# EAGLE board Qwiic_4_Pin_Fan_Controller-Panel (EAGLE 9.5.2), part 1 of 2
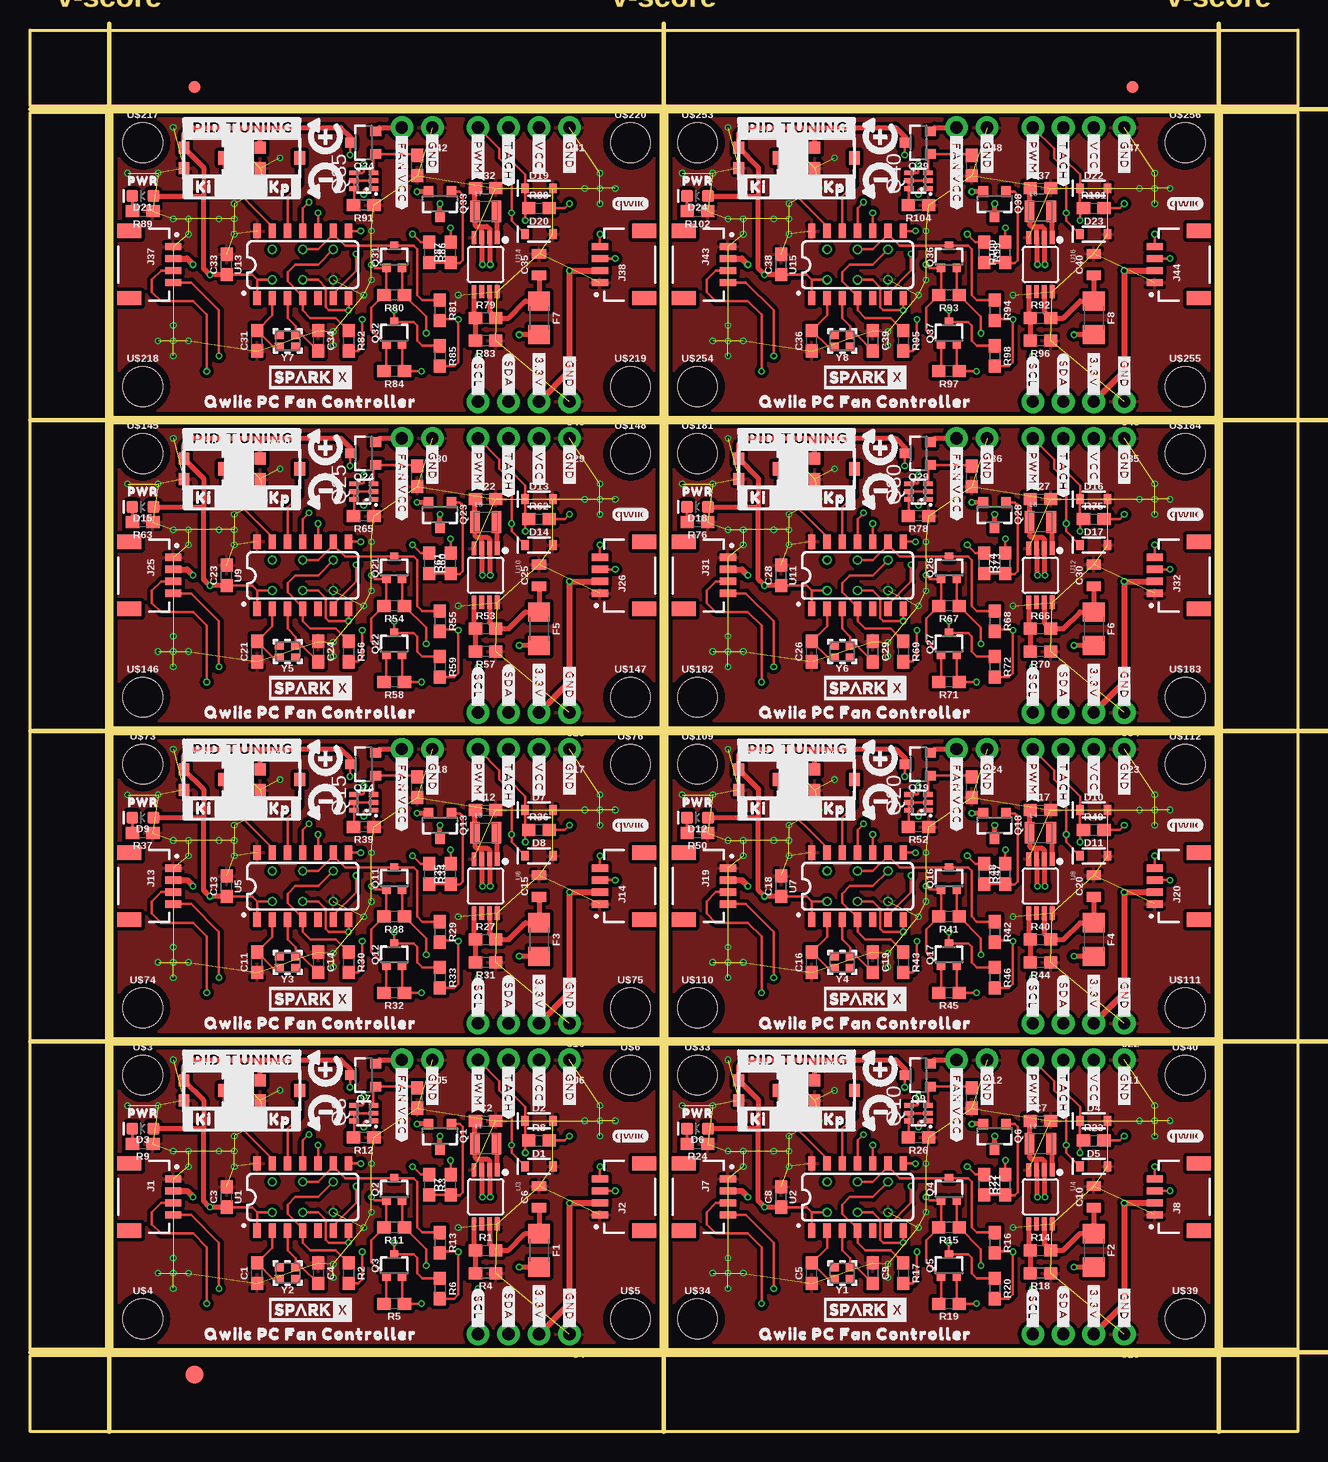
[diagram p0: board, top side]
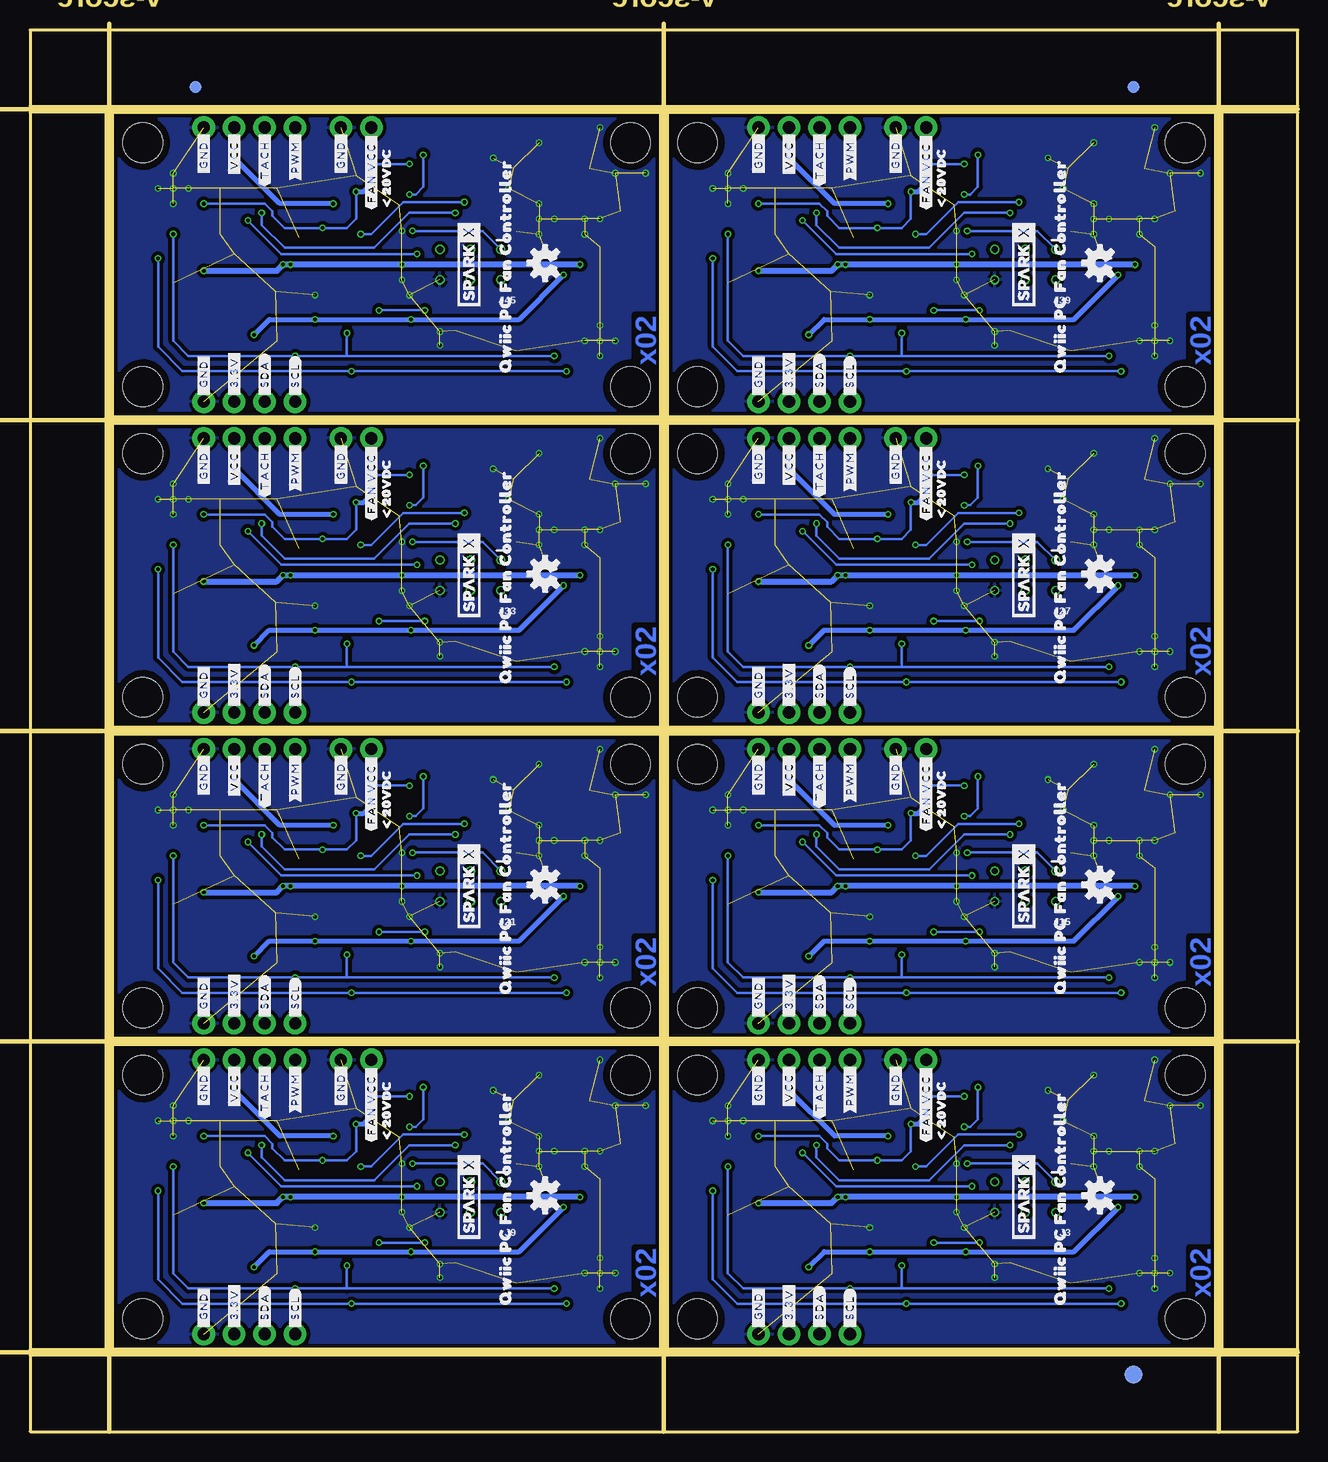
[diagram p1: board, bottom side, seen from below]

Size 105.66 x 116.84 mm. Coordinates in mm from the lower left corner, seen from the top.
Outline: 6.86,6.86 52.58,6.86 52.58,32.26 6.86,32.26 6.86,6.86
Outline: 53.09,6.86 98.81,6.86 98.81,32.26 53.09,32.26 53.09,6.86
Outline: 6.86,32.77 52.58,32.77 52.58,58.17 6.86,58.17 6.86,32.77
Outline: 53.09,32.77 98.81,32.77 98.81,58.17 53.09,58.17 53.09,32.77
Outline: 6.86,58.67 52.58,58.67 52.58,84.07 6.86,84.07 6.86,58.67
Outline: 53.09,58.67 98.81,58.67 98.81,84.07 53.09,84.07 53.09,58.67
Outline: 6.86,84.58 52.58,84.58 52.58,109.98 6.86,109.98 6.86,84.58
Outline: 53.09,84.58 98.81,84.58 98.81,109.98 53.09,109.98 53.09,84.58
Outline: 0,6.35 105.66,6.35 105.66,0 0,0 0,6.35
Outline: 99.31,109.98 105.66,109.98 105.66,6.86 99.31,6.86 99.31,109.98
Outline: 0,116.84 105.66,116.84 105.66,110.49 0,110.49 0,116.84
Outline: 0,109.98 6.35,109.98 6.35,6.86 0,6.86 0,109.98
Copper layers (1*16): Top 0.035mm / dielectric 1.5mm / Bottom 0.035mm
Design rules "Qwiic_4_Pin_Fan_Controller": minimum track width 5mil, minimum drill 0.3mm, track to track 5mil, track to pad 5mil, pad to pad 5mil, via to via 5mil, smd to smd 5mil, copper to edge 7mil, drill to drill 7mil, minimum pad ring 5mil, minimum via ring 5mil, stop-mask expansion 4mil, vias tented up to drill 25mil, thermal gap 10mil
Net classes: 1 power: width 0.203 mm
Milling: 8 lines

## Footprints (pad centres in the part's own frame; a part is rotated, then mirrored left to right if it is on the bottom)
0603 = smd 1.1 x 1: 1 -0.85,0; 2 0.85,0
0805 = smd 0.8 x 1.2: 1 -0.9,0; 2 0.9,0
SOD-323 = smd 0.63 x 0.83: A 1.15,0; C -1.15,0
LED-0603 = smd 1 x 1: A -0.877,0; C 0.877,0
FIDUCIAL-1X2 = smd 1 x 1: 1 0,0
FIDUCIAL-1.5X3 = smd 1.5 x 1.5: 1 0,0
1206 = smd 1.6 x 1.8: 1 -1.4,0; 2 1.4,0
JST04_1MM_RA = smd 0.6 x 1.35: 1 -1.5,0; 2 -0.5,0; 3 0.5,0; 4 1.5,0 | smd 1.2 x 2: NC1 2.8,-3.675; NC2 -2.8,-3.675
2X3_TEST_POINTS = drill 0.508: 1 -2.54,-1.27; 2 -2.54,1.27; 3 0,-1.27; 4 0,1.27; 5 2.54,-1.27; 6 2.54,1.27
1X04_NO_SILK = drill 1.016 pad 1.88: 1 0,0; 2 2.54,0; 3 5.08,0; 4 7.62,0
1X02_NO_SILK = drill 1.016 pad 1.88: 1 0,0; 2 2.54,0
0806 = smd 0.8 x 1.8: 1 -0.9,0; 2 0.9,0
SOT23-3 = smd 0.8 x 0.9: 1 -0.95,-1; 2 0.95,-1; 3 0,1.1
SOT323 = smd 0.7 x 0.7: 1 -0.65,-0.925; 2 0.65,-0.925; 3 0,0.925
SOT363_PHILIPS = smd 0.4 x 0.8: 1 -0.65,-0.8; 2 0,-0.8; 3 0.65,-0.8; 4 0.65,0.8; 5 0,0.8; 6 -0.65,0.8
0603@1 = smd 1.1 x 1: 1 -0.85,0; 2 0.85,0
SO14 = smd 0.6 x 1.2: 1 -3.81,-2.8; 2 -2.54,-2.8; 3 -1.27,-2.8; 4 0,-2.8; 5 1.27,-2.8; 6 2.54,-2.8; 7 3.81,-2.8; 8 3.81,2.8; 9 2.54,2.8; 10 1.27,2.8; 11 0,2.8; 12 -1.27,2.8; 13 -2.54,2.8; 14 -3.81,2.8
MSOP8 = smd 0.4 x 1.1: 1 -0.975,-2.25; 2 -0.325,-2.25; 3 0.325,-2.25; 4 0.975,-2.25; 5 0.975,2.25; 6 0.325,2.25; 7 -0.325,2.25; 8 -0.975,2.25
STAND-OFF = hole 3.302: 0,0
TRIMPOT-SMD-3MM-CLOSED = smd 1 x 0.9: 1 -0.85,-1.65; 3 0.85,-1.65 | smd 1.1 x 0.9: 2 0,1.65
CRYSTAL-SMD-2.0X1.6MM = smd 0.75 x 0.7: 1 -0.675,-0.5; 2 0.675,-0.5; 3 0.675,0.5; 4 -0.675,0.5

## Placement (x,y rotation side)
C1  22pF  [0603]  18.92,13.21 90 top
C2  10uF  [0603]  37.97,25.91 0 top
C3  0.1uF  [0603]  16.38,19.56 90 top
C4  22pF  [0603]  24,13.21 270 top
C5  22pF  [0603]  65.15,13.21 90 top
C6  22uF  [0805]  42.42,19.56 90 top
C7  10uF  [0603]  84.2,25.91 0 top
C8  0.1uF  [0603]  62.61,19.56 90 top
C9  22pF  [0603]  70.23,13.21 270 top
C10  22uF  [0805]  88.65,19.56 90 top
C11  22pF  [0603]  18.92,39.12 90 top
C12  10uF  [0603]  37.97,51.82 0 top
C13  0.1uF  [0603]  16.38,45.47 90 top
C14  22pF  [0603]  24,39.12 270 top
C15  22uF  [0805]  42.42,45.47 90 top
C16  22pF  [0603]  65.15,39.12 90 top
C17  10uF  [0603]  84.2,51.82 0 top
C18  0.1uF  [0603]  62.61,45.47 90 top
C19  22pF  [0603]  70.23,39.12 270 top
C20  22uF  [0805]  88.65,45.47 90 top
C21  22pF  [0603]  18.92,65.02 90 top
C22  10uF  [0603]  37.97,77.72 0 top
C23  0.1uF  [0603]  16.38,71.37 90 top
C24  22pF  [0603]  24,65.02 270 top
C25  22uF  [0805]  42.42,71.37 90 top
C26  22pF  [0603]  65.15,65.02 90 top
C27  10uF  [0603]  84.2,77.72 0 top
C28  0.1uF  [0603]  62.61,71.37 90 top
C29  22pF  [0603]  70.23,65.02 270 top
C30  22uF  [0805]  88.65,71.37 90 top
C31  22pF  [0603]  18.92,90.93 90 top
C32  10uF  [0603]  37.97,103.63 0 top
C33  0.1uF  [0603]  16.38,97.28 90 top
C34  22pF  [0603]  24,90.93 270 top
C35  22uF  [0805]  42.42,97.28 90 top
C36  22pF  [0603]  65.15,90.93 90 top
C37  10uF  [0603]  84.2,103.63 0 top
C38  0.1uF  [0603]  62.61,97.28 90 top
C39  22pF  [0603]  70.23,90.93 270 top
C40  22uF  [0805]  88.65,97.28 90 top
D1  3.6V  [SOD-323]  42.42,22.1 0 top
D2  3.6V  [SOD-323]  42.42,25.91 0 top
D3  RED  [LED-0603]  9.4,25.27 180 top
D4  3.6V  [SOD-323]  88.65,25.91 0 top
D5  3.6V  [SOD-323]  88.65,22.1 0 top
D6  RED  [LED-0603]  55.63,25.27 180 top
D7  3.6V  [SOD-323]  42.42,51.82 0 top
D8  3.6V  [SOD-323]  42.42,48.01 0 top
D9  RED  [LED-0603]  9.4,51.18 180 top
D10  3.6V  [SOD-323]  88.65,51.82 0 top
D11  3.6V  [SOD-323]  88.65,48.01 0 top
D12  RED  [LED-0603]  55.63,51.18 180 top
D13  3.6V  [SOD-323]  42.42,77.72 0 top
D14  3.6V  [SOD-323]  42.42,73.91 0 top
D15  RED  [LED-0603]  9.4,77.09 180 top
D16  3.6V  [SOD-323]  88.65,77.72 0 top
D17  3.6V  [SOD-323]  88.65,73.91 0 top
D18  RED  [LED-0603]  55.63,77.09 180 top
D19  3.6V  [SOD-323]  42.42,103.63 0 top
D20  3.6V  [SOD-323]  42.42,99.82 0 top
D21  RED  [LED-0603]  9.4,103 180 top
D22  3.6V  [SOD-323]  88.65,103.63 0 top
D23  3.6V  [SOD-323]  88.65,99.82 0 top
D24  RED  [LED-0603]  55.63,103 180 top
E$1  [FIDUCIAL-1X2]  13.72,112.08 0 top
E$2  [FIDUCIAL-1X2]  13.72,112.08 0 bottom
E$3  [FIDUCIAL-1X2]  91.88,112.08 0 top
E$4  [FIDUCIAL-1X2]  91.88,112.08 0 bottom
E$5  [FIDUCIAL-1.5X3]  13.72,4.76 0 top
E$6  [FIDUCIAL-1.5X3]  13.72,4.76 0 bottom
F1  6V/0.75A  [1206]  42.42,15.11 270 top
F2  6V/0.75A  [1206]  88.65,15.11 270 top
F3  6V/0.75A  [1206]  42.42,41.02 270 top
F4  6V/0.75A  [1206]  88.65,41.02 270 top
F5  6V/0.75A  [1206]  42.42,66.93 270 top
F6  6V/0.75A  [1206]  88.65,66.93 270 top
F7  6V/0.75A  [1206]  42.42,92.84 270 top
F8  6V/0.75A  [1206]  88.65,92.84 270 top
J1  QWIIC_RIGHT_ANGLE  [JST04_1MM_RA]  11.94,19.56 270 top
J2  QWIIC_RIGHT_ANGLE  [JST04_1MM_RA]  47.5,19.56 90 top
J3  AVR_SPI_PROG_3X2TESTPOINTS  [2X3_TEST_POINTS]  22.73,19.56 180 bottom
J4  [1X04_NO_SILK]  44.96,8.13 180 top
J5  [1X02_NO_SILK]  33.53,30.99 180 top
J6  [1X04_NO_SILK]  44.96,30.99 180 top
J7  QWIIC_RIGHT_ANGLE  [JST04_1MM_RA]  58.17,19.56 270 top
J8  QWIIC_RIGHT_ANGLE  [JST04_1MM_RA]  93.73,19.56 90 top
J9  AVR_SPI_PROG_3X2TESTPOINTS  [2X3_TEST_POINTS]  68.96,19.56 180 bottom
J10  [1X04_NO_SILK]  91.19,8.13 180 top
J11  [1X04_NO_SILK]  91.19,30.99 180 top
J12  [1X02_NO_SILK]  79.76,30.99 180 top
J13  QWIIC_RIGHT_ANGLE  [JST04_1MM_RA]  11.94,45.47 270 top
J14  QWIIC_RIGHT_ANGLE  [JST04_1MM_RA]  47.5,45.47 90 top
J15  AVR_SPI_PROG_3X2TESTPOINTS  [2X3_TEST_POINTS]  22.73,45.47 180 bottom
J16  [1X04_NO_SILK]  44.96,34.04 180 top
J17  [1X04_NO_SILK]  44.96,56.9 180 top
J18  [1X02_NO_SILK]  33.53,56.9 180 top
J19  QWIIC_RIGHT_ANGLE  [JST04_1MM_RA]  58.17,45.47 270 top
J20  QWIIC_RIGHT_ANGLE  [JST04_1MM_RA]  93.73,45.47 90 top
J21  AVR_SPI_PROG_3X2TESTPOINTS  [2X3_TEST_POINTS]  68.96,45.47 180 bottom
J22  [1X04_NO_SILK]  91.19,34.04 180 top
J23  [1X04_NO_SILK]  91.19,56.9 180 top
J24  [1X02_NO_SILK]  79.76,56.9 180 top
J25  QWIIC_RIGHT_ANGLE  [JST04_1MM_RA]  11.94,71.37 270 top
J26  QWIIC_RIGHT_ANGLE  [JST04_1MM_RA]  47.5,71.37 90 top
J27  AVR_SPI_PROG_3X2TESTPOINTS  [2X3_TEST_POINTS]  22.73,71.37 180 bottom
J28  [1X04_NO_SILK]  44.96,59.94 180 top
J29  [1X04_NO_SILK]  44.96,82.8 180 top
J30  [1X02_NO_SILK]  33.53,82.8 180 top
J31  QWIIC_RIGHT_ANGLE  [JST04_1MM_RA]  58.17,71.37 270 top
J32  QWIIC_RIGHT_ANGLE  [JST04_1MM_RA]  93.73,71.37 90 top
J33  AVR_SPI_PROG_3X2TESTPOINTS  [2X3_TEST_POINTS]  68.96,71.37 180 bottom
J34  [1X04_NO_SILK]  91.19,59.94 180 top
J35  [1X04_NO_SILK]  91.19,82.8 180 top
J36  [1X02_NO_SILK]  79.76,82.8 180 top
J37  QWIIC_RIGHT_ANGLE  [JST04_1MM_RA]  11.94,97.28 270 top
J38  QWIIC_RIGHT_ANGLE  [JST04_1MM_RA]  47.5,97.28 90 top
J39  AVR_SPI_PROG_3X2TESTPOINTS  [2X3_TEST_POINTS]  22.73,97.28 180 bottom
J40  [1X04_NO_SILK]  44.96,85.85 180 top
J41  [1X04_NO_SILK]  44.96,108.71 180 top
J42  [1X02_NO_SILK]  33.53,108.71 180 top
J43  QWIIC_RIGHT_ANGLE  [JST04_1MM_RA]  58.17,97.28 270 top
J44  QWIIC_RIGHT_ANGLE  [JST04_1MM_RA]  93.73,97.28 90 top
J45  AVR_SPI_PROG_3X2TESTPOINTS  [2X3_TEST_POINTS]  68.96,97.28 180 bottom
J46  [1X04_NO_SILK]  91.19,85.85 180 top
J47  [1X04_NO_SILK]  91.19,108.71 180 top
J48  [1X02_NO_SILK]  79.76,108.71 180 top
L1  2.2μH  [0806]  37.97,24 0 top
L2  2.2μH  [0806]  84.2,24 0 top
L3  2.2μH  [0806]  37.97,49.91 0 top
L4  2.2μH  [0806]  84.2,49.91 0 top
L5  2.2μH  [0806]  37.97,75.82 0 top
L6  2.2μH  [0806]  84.2,75.82 0 top
L7  2.2μH  [0806]  37.97,101.73 0 top
L8  2.2μH  [0806]  84.2,101.73 0 top
Q1  20V/4.2A/52mΩ/1.4W  [SOT23-3]  34.16,24.64 180 top
Q2  310mA/60V/1.6Ω  [SOT323]  30.35,20.19 0 top
Q3  310mA/60V/1.6Ω  [SOT323]  30.35,13.84 0 top
Q4  310mA/60V/1.6Ω  [SOT323]  76.58,20.19 0 top
Q5  310mA/60V/1.6Ω  [SOT323]  76.58,13.84 0 top
Q6  20V/4.2A/52mΩ/1.4W  [SOT23-3]  80.39,24.64 180 top
Q7  20V/4.2A/52mΩ/1.4W  [SOT23-3]  27.81,29.72 90 top
Q8  [SOT363_PHILIPS]  27.81,26.54 90 top
Q9  20V/4.2A/52mΩ/1.4W  [SOT23-3]  74.04,29.72 90 top
Q10  [SOT363_PHILIPS]  74.04,26.54 90 top
Q11  310mA/60V/1.6Ω  [SOT323]  30.35,46.1 0 top
Q12  310mA/60V/1.6Ω  [SOT323]  30.35,39.75 0 top
Q13  20V/4.2A/52mΩ/1.4W  [SOT23-3]  34.16,50.55 180 top
Q14  20V/4.2A/52mΩ/1.4W  [SOT23-3]  27.81,55.63 90 top
Q15  [SOT363_PHILIPS]  27.81,52.45 90 top
Q16  310mA/60V/1.6Ω  [SOT323]  76.58,46.1 0 top
Q17  310mA/60V/1.6Ω  [SOT323]  76.58,39.75 0 top
Q18  20V/4.2A/52mΩ/1.4W  [SOT23-3]  80.39,50.55 180 top
Q19  20V/4.2A/52mΩ/1.4W  [SOT23-3]  74.04,55.63 90 top
Q20  [SOT363_PHILIPS]  74.04,52.45 90 top
Q21  310mA/60V/1.6Ω  [SOT323]  30.35,72.01 0 top
Q22  310mA/60V/1.6Ω  [SOT323]  30.35,65.66 0 top
Q23  20V/4.2A/52mΩ/1.4W  [SOT23-3]  34.16,76.45 180 top
Q24  20V/4.2A/52mΩ/1.4W  [SOT23-3]  27.81,81.53 90 top
Q25  [SOT363_PHILIPS]  27.81,78.36 90 top
Q26  310mA/60V/1.6Ω  [SOT323]  76.58,72.01 0 top
Q27  310mA/60V/1.6Ω  [SOT323]  76.58,65.66 0 top
Q28  20V/4.2A/52mΩ/1.4W  [SOT23-3]  80.39,76.45 180 top
Q29  20V/4.2A/52mΩ/1.4W  [SOT23-3]  74.04,81.53 90 top
Q30  [SOT363_PHILIPS]  74.04,78.36 90 top
Q31  310mA/60V/1.6Ω  [SOT323]  30.35,97.92 0 top
Q32  310mA/60V/1.6Ω  [SOT323]  30.35,91.57 0 top
Q33  20V/4.2A/52mΩ/1.4W  [SOT23-3]  34.16,102.36 180 top
Q34  20V/4.2A/52mΩ/1.4W  [SOT23-3]  27.81,107.44 90 top
Q35  [SOT363_PHILIPS]  27.81,104.27 90 top
Q36  310mA/60V/1.6Ω  [SOT323]  76.58,97.92 0 top
Q37  310mA/60V/1.6Ω  [SOT323]  76.58,91.57 0 top
Q38  20V/4.2A/52mΩ/1.4W  [SOT23-3]  80.39,102.36 180 top
Q39  20V/4.2A/52mΩ/1.4W  [SOT23-3]  74.04,107.44 90 top
Q40  [SOT363_PHILIPS]  74.04,104.27 90 top
R1  750K  [0603]  37.97,15.11 0 top
R2  10k  [0603@1]  26.54,13.21 270 top
R3  1k  [0603]  33.27,20.57 270 top
R4  100k  [0603]  37.97,13.21 180 top
R5  2.2k  [0603]  30.35,10.67 180 top
R6  2.2k  [0603]  34.16,11.94 270 top
R7  10k  [0603@1]  35.05,20.57 90 top
R8  10k  [0603@1]  42.42,24.26 0 top
R9  1k  [0603]  9.4,24 180 top
R10  47k  [0603@1]  32.26,27.81 90 top
R11  2.2k  [0603]  30.35,17.02 180 top
R12  10k  [0603@1]  27.81,24.51 180 top
R13  2.2k  [0603]  34.16,15.75 270 top
R14  750K  [0603]  84.2,15.11 0 top
R15  2.2k  [0603]  76.58,17.02 180 top
R16  2.2k  [0603]  80.39,15.75 270 top
R17  10k  [0603@1]  72.77,13.21 270 top
R18  100k  [0603]  84.2,13.21 180 top
R19  2.2k  [0603]  76.58,10.67 180 top
R20  2.2k  [0603]  80.39,11.94 270 top
R21  1k  [0603]  79.5,20.57 270 top
R22  10k  [0603@1]  81.28,20.57 90 top
R23  10k  [0603@1]  88.65,24.26 0 top
R24  1k  [0603]  55.63,24 180 top
R25  47k  [0603@1]  78.49,27.81 90 top
R26  10k  [0603@1]  74.04,24.51 180 top
R27  750K  [0603]  37.97,41.02 0 top
R28  2.2k  [0603]  30.35,42.93 180 top
R29  2.2k  [0603]  34.16,41.66 270 top
R30  10k  [0603@1]  26.54,39.12 270 top
R31  100k  [0603]  37.97,39.12 180 top
R32  2.2k  [0603]  30.35,36.58 180 top
R33  2.2k  [0603]  34.16,37.85 270 top
R34  1k  [0603]  33.27,46.48 270 top
R35  10k  [0603@1]  35.05,46.48 90 top
R36  10k  [0603@1]  42.42,50.16 0 top
R37  1k  [0603]  9.4,49.91 180 top
R38  47k  [0603@1]  32.26,53.72 90 top
R39  10k  [0603@1]  27.81,50.42 180 top
R40  750K  [0603]  84.2,41.02 0 top
R41  2.2k  [0603]  76.58,42.93 180 top
R42  2.2k  [0603]  80.39,41.66 270 top
R43  10k  [0603@1]  72.77,39.12 270 top
R44  100k  [0603]  84.2,39.12 180 top
R45  2.2k  [0603]  76.58,36.58 180 top
R46  2.2k  [0603]  80.39,37.85 270 top
R47  1k  [0603]  79.5,46.48 270 top
R48  10k  [0603@1]  81.28,46.48 90 top
R49  10k  [0603@1]  88.65,50.16 0 top
R50  1k  [0603]  55.63,49.91 180 top
R51  47k  [0603@1]  78.49,53.72 90 top
R52  10k  [0603@1]  74.04,50.42 180 top
R53  750K  [0603]  37.97,66.93 0 top
R54  2.2k  [0603]  30.35,68.83 180 top
R55  2.2k  [0603]  34.16,67.56 270 top
R56  10k  [0603@1]  26.54,65.02 270 top
R57  100k  [0603]  37.97,65.02 180 top
R58  2.2k  [0603]  30.35,62.48 180 top
R59  2.2k  [0603]  34.16,63.75 270 top
R60  1k  [0603]  33.27,72.39 270 top
R61  10k  [0603@1]  35.05,72.39 90 top
R62  10k  [0603@1]  42.42,76.07 0 top
R63  1k  [0603]  9.4,75.82 180 top
R64  47k  [0603@1]  32.26,79.63 90 top
R65  10k  [0603@1]  27.81,76.33 180 top
R66  750K  [0603]  84.2,66.93 0 top
R67  2.2k  [0603]  76.58,68.83 180 top
R68  2.2k  [0603]  80.39,67.56 270 top
R69  10k  [0603@1]  72.77,65.02 270 top
R70  100k  [0603]  84.2,65.02 180 top
R71  2.2k  [0603]  76.58,62.48 180 top
R72  2.2k  [0603]  80.39,63.75 270 top
R73  1k  [0603]  79.5,72.39 270 top
R74  10k  [0603@1]  81.28,72.39 90 top
R75  10k  [0603@1]  88.65,76.07 0 top
R76  1k  [0603]  55.63,75.82 180 top
R77  47k  [0603@1]  78.49,79.63 90 top
R78  10k  [0603@1]  74.04,76.33 180 top
R79  750K  [0603]  37.97,92.84 0 top
R80  2.2k  [0603]  30.35,94.74 180 top
R81  2.2k  [0603]  34.16,93.47 270 top
R82  10k  [0603@1]  26.54,90.93 270 top
R83  100k  [0603]  37.97,90.93 180 top
R84  2.2k  [0603]  30.35,88.39 180 top
R85  2.2k  [0603]  34.16,89.66 270 top
R86  1k  [0603]  33.27,98.3 270 top
R87  10k  [0603@1]  35.05,98.3 90 top
R88  10k  [0603@1]  42.42,101.98 0 top
R89  1k  [0603]  9.4,101.73 180 top
R90  47k  [0603@1]  32.26,105.54 90 top
R91  10k  [0603@1]  27.81,102.23 180 top
R92  750K  [0603]  84.2,92.84 0 top
R93  2.2k  [0603]  76.58,94.74 180 top
R94  2.2k  [0603]  80.39,93.47 270 top
R95  10k  [0603@1]  72.77,90.93 270 top
R96  100k  [0603]  84.2,90.93 180 top
R97  2.2k  [0603]  76.58,88.39 180 top
R98  2.2k  [0603]  80.39,89.66 270 top
R99  1k  [0603]  79.5,98.3 270 top
R100  10k  [0603@1]  81.28,98.3 90 top
R101  10k  [0603@1]  88.65,101.98 0 top
R102  1k  [0603]  55.63,101.73 180 top
R103  47k  [0603@1]  78.49,105.54 90 top
R104  10k  [0603@1]  74.04,102.23 180 top
U1  ATtiny841  [SO14]  22.73,19.56 0 top
U2  ATtiny841  [SO14]  68.96,19.56 0 top
U3  PAM2401  [MSOP8]  37.97,19.56 180 top
U4  PAM2401  [MSOP8]  84.2,19.56 180 top
U5  ATtiny841  [SO14]  22.73,45.47 0 top
U6  PAM2401  [MSOP8]  37.97,45.47 180 top
U7  ATtiny841  [SO14]  68.96,45.47 0 top
U8  PAM2401  [MSOP8]  84.2,45.47 180 top
U9  ATtiny841  [SO14]  22.73,71.37 0 top
U10  PAM2401  [MSOP8]  37.97,71.37 180 top
U11  ATtiny841  [SO14]  68.96,71.37 0 top
U12  PAM2401  [MSOP8]  84.2,71.37 180 top
U13  ATtiny841  [SO14]  22.73,97.28 0 top
U14  PAM2401  [MSOP8]  37.97,97.28 180 top
U15  ATtiny841  [SO14]  68.96,97.28 0 top
U16  PAM2401  [MSOP8]  84.2,97.28 180 top
U$1  [#_GND#0]  44.96,30.61 270 top
U$2  [#_VCC#0]  42.42,30.61 270 top
U$3  [STAND-OFF]  9.4,29.72 0 top
U$4  [STAND-OFF]  9.4,9.4 0 top
U$5  [STAND-OFF]  50.04,9.4 0 top
U$6  [STAND-OFF]  50.04,29.72 0 top
U$7  [#_TACH#0]  39.88,30.61 270 top
U$8  [#_PWM#0]  37.34,30.61 270 top
U$9  [#_GND#0]  33.53,30.61 270 top
U$10  [#GND_#0]  44.96,8.51 270 top
U$11  [#3#3V_#0]  42.42,8.51 270 top
U$12  [#SDA_#0]  39.88,8.51 270 top
U$13  [#SCL_#0]  37.34,8.51 270 top
U$14  [#PID_TUNING0]  17.78,30.99 0 top
U$15  [KI0]  14.48,26.04 0 top
U$16  [KP0]  20.83,26.04 0 top
U$17  [QWIIC_3MM]  50.04,24.64 0 top
U$18  [SPARKX-SMALL]  23.37,10.16 0 top
U$19  [#_FAN_VCC#0]  30.99,30.48 270 top
U$20  [#GND_#0]  44.96,30.61 90 bottom
U$21  [#_GND#0]  44.96,8.51 90 bottom
U$22  [PWR0]  9.4,26.54 0 top
U$23  [#VCC_#0]  42.42,30.61 90 bottom
U$24  [#TACH_#0]  39.88,30.61 90 bottom
U$25  [#PWM_#0]  37.34,30.61 90 bottom
U$26  [#GND_#0]  33.53,30.61 90 bottom
U$27  [#_3#3V#0]  42.42,8.51 90 bottom
U$28  [#_SDA#0]  39.88,8.51 90 bottom
U$29  [#_SCL#0]  37.34,8.51 90 bottom
U$30  [QWIIC_PC_FAN_CONTROLLER0]  23.37,8.13 0 top
U$31  [#FAN_VCC_#0]  30.99,30.48 90 bottom
U$32  [_#_20VDC0]  29.72,29.72 90 bottom
U$33  [STAND-OFF]  55.63,29.72 0 top
U$34  [STAND-OFF]  55.63,9.4 0 top
U$35  [QWIIC_PC_FAN_CONTROLLER0]  19.81,19.43 90 bottom
U$36  [SPARKX-SMALL]  22.86,19.56 90 bottom
U$37  [OSHW-LOGO-S]  16.51,19.68 90 bottom
U$38  [TURN_INDICATOR#SVG0]  22.99,31.88 0 top
U$39  [STAND-OFF]  96.27,9.4 0 top
U$40  [STAND-OFF]  96.27,29.72 0 top
U$41  [#_GND#0]  91.19,30.61 270 top
U$42  [#_VCC#0]  88.65,30.61 270 top
U$43  [#_TACH#0]  86.11,30.61 270 top
U$44  [#_PWM#0]  83.57,30.61 270 top
U$45  [#_GND#0]  79.76,30.61 270 top
U$46  [#GND_#0]  91.19,8.51 270 top
U$47  [#3#3V_#0]  88.65,8.51 270 top
U$48  [#SDA_#0]  86.11,8.51 270 top
U$49  [#SCL_#0]  83.57,8.51 270 top
U$50  [QWIIC_3MM]  96.27,24.64 0 top
U$51  [SPARKX-SMALL]  69.6,10.16 0 top
U$52  [#GND_#0]  91.19,30.61 90 bottom
U$53  [#_GND#0]  91.19,8.51 90 bottom
U$54  [#VCC_#0]  88.65,30.61 90 bottom
U$55  [#TACH_#0]  86.11,30.61 90 bottom
U$56  [#PWM_#0]  83.57,30.61 90 bottom
U$57  [#GND_#0]  79.76,30.61 90 bottom
U$58  [#_3#3V#0]  88.65,8.51 90 bottom
U$59  [#_SDA#0]  86.11,8.51 90 bottom
U$60  [#_SCL#0]  83.57,8.51 90 bottom
U$61  [QWIIC_PC_FAN_CONTROLLER0]  69.6,8.13 0 top
U$62  [SPARKX-SMALL]  69.09,19.56 90 bottom
U$63  [QWIIC_PC_FAN_CONTROLLER0]  66.04,19.43 90 bottom
U$64  [OSHW-LOGO-S]  62.74,19.68 90 bottom
U$65  [#_FAN_VCC#0]  77.22,30.48 270 top
U$66  [#PID_TUNING0]  64.01,30.99 0 top
U$67  [KI0]  60.71,26.04 0 top
U$68  [KP0]  67.06,26.04 0 top
U$69  [PWR0]  55.63,26.54 0 top
U$70  [TURN_INDICATOR#SVG0]  69.22,31.88 0 top
U$71  [#FAN_VCC_#0]  77.22,30.48 90 bottom
U$72  [_#_20VDC0]  75.95,29.72 90 bottom
U$73  [STAND-OFF]  9.4,55.63 0 top
U$74  [STAND-OFF]  9.4,35.31 0 top
U$75  [STAND-OFF]  50.04,35.31 0 top
U$76  [STAND-OFF]  50.04,55.63 0 top
U$77  [#_GND#0]  44.96,56.51 270 top
U$78  [#_VCC#0]  42.42,56.51 270 top
U$79  [#_TACH#0]  39.88,56.51 270 top
U$80  [#_PWM#0]  37.34,56.51 270 top
U$81  [#_GND#0]  33.53,56.51 270 top
U$82  [#GND_#0]  44.96,34.42 270 top
U$83  [#3#3V_#0]  42.42,34.42 270 top
U$84  [#SDA_#0]  39.88,34.42 270 top
U$85  [#SCL_#0]  37.34,34.42 270 top
U$86  [QWIIC_3MM]  50.04,50.55 0 top
U$87  [SPARKX-SMALL]  23.37,36.07 0 top
U$88  [#GND_#0]  44.96,56.51 90 bottom
U$89  [#_GND#0]  44.96,34.42 90 bottom
U$90  [#VCC_#0]  42.42,56.51 90 bottom
U$91  [#TACH_#0]  39.88,56.51 90 bottom
U$92  [#PWM_#0]  37.34,56.51 90 bottom
U$93  [#GND_#0]  33.53,56.51 90 bottom
U$94  [#_3#3V#0]  42.42,34.42 90 bottom
U$95  [#_SDA#0]  39.88,34.42 90 bottom
U$96  [#_SCL#0]  37.34,34.42 90 bottom
U$97  [QWIIC_PC_FAN_CONTROLLER0]  23.37,34.04 0 top
U$98  [SPARKX-SMALL]  22.86,45.47 90 bottom
U$99  [QWIIC_PC_FAN_CONTROLLER0]  19.81,45.34 90 bottom
U$100  [OSHW-LOGO-S]  16.51,45.59 90 bottom
U$101  [#_FAN_VCC#0]  30.99,56.39 270 top
U$102  [#PID_TUNING0]  17.78,56.9 0 top
U$103  [KI0]  14.48,51.94 0 top
U$104  [KP0]  20.83,51.94 0 top
U$105  [PWR0]  9.4,52.45 0 top
U$106  [TURN_INDICATOR#SVG0]  22.99,57.78 0 top
U$107  [#FAN_VCC_#0]  30.99,56.39 90 bottom
U$108  [_#_20VDC0]  29.72,55.63 90 bottom
U$109  [STAND-OFF]  55.63,55.63 0 top
U$110  [STAND-OFF]  55.63,35.31 0 top
U$111  [STAND-OFF]  96.27,35.31 0 top
U$112  [STAND-OFF]  96.27,55.63 0 top
U$113  [#_GND#0]  91.19,56.51 270 top
U$114  [#_VCC#0]  88.65,56.51 270 top
U$115  [#_TACH#0]  86.11,56.51 270 top
U$116  [#_PWM#0]  83.57,56.51 270 top
U$117  [#_GND#0]  79.76,56.51 270 top
U$118  [#GND_#0]  91.19,34.42 270 top
U$119  [#3#3V_#0]  88.65,34.42 270 top
U$120  [#SDA_#0]  86.11,34.42 270 top
U$121  [#SCL_#0]  83.57,34.42 270 top
U$122  [QWIIC_3MM]  96.27,50.55 0 top
U$123  [SPARKX-SMALL]  69.6,36.07 0 top
U$124  [#GND_#0]  91.19,56.51 90 bottom
U$125  [#_GND#0]  91.19,34.42 90 bottom
U$126  [#VCC_#0]  88.65,56.51 90 bottom
U$127  [#TACH_#0]  86.11,56.51 90 bottom
U$128  [#PWM_#0]  83.57,56.51 90 bottom
U$129  [#GND_#0]  79.76,56.51 90 bottom
U$130  [#_3#3V#0]  88.65,34.42 90 bottom
U$131  [#_SDA#0]  86.11,34.42 90 bottom
U$132  [#_SCL#0]  83.57,34.42 90 bottom
U$133  [QWIIC_PC_FAN_CONTROLLER0]  69.6,34.04 0 top
U$134  [SPARKX-SMALL]  69.09,45.47 90 bottom
U$135  [QWIIC_PC_FAN_CONTROLLER0]  66.04,45.34 90 bottom
U$136  [OSHW-LOGO-S]  62.74,45.59 90 bottom
U$137  [#_FAN_VCC#0]  77.22,56.39 270 top
U$138  [#PID_TUNING0]  64.01,56.9 0 top
U$139  [KI0]  60.71,51.94 0 top
U$140  [KP0]  67.06,51.94 0 top
U$141  [PWR0]  55.63,52.45 0 top
U$142  [TURN_INDICATOR#SVG0]  69.22,57.78 0 top
U$143  [#FAN_VCC_#0]  77.22,56.39 90 bottom
U$144  [_#_20VDC0]  75.95,55.63 90 bottom
U$145  [STAND-OFF]  9.4,81.53 0 top
U$146  [STAND-OFF]  9.4,61.21 0 top
U$147  [STAND-OFF]  50.04,61.21 0 top
U$148  [STAND-OFF]  50.04,81.53 0 top
U$149  [#_GND#0]  44.96,82.42 270 top
U$150  [#_VCC#0]  42.42,82.42 270 top
U$151  [#_TACH#0]  39.88,82.42 270 top
U$152  [#_PWM#0]  37.34,82.42 270 top
U$153  [#_GND#0]  33.53,82.42 270 top
U$154  [#GND_#0]  44.96,60.32 270 top
U$155  [#3#3V_#0]  42.42,60.32 270 top
U$156  [#SDA_#0]  39.88,60.32 270 top
U$157  [#SCL_#0]  37.34,60.32 270 top
U$158  [QWIIC_3MM]  50.04,76.45 0 top
U$159  [SPARKX-SMALL]  23.37,61.98 0 top
U$160  [#GND_#0]  44.96,82.42 90 bottom
U$161  [#_GND#0]  44.96,60.32 90 bottom
U$162  [#VCC_#0]  42.42,82.42 90 bottom
U$163  [#TACH_#0]  39.88,82.42 90 bottom
U$164  [#PWM_#0]  37.34,82.42 90 bottom
U$165  [#GND_#0]  33.53,82.42 90 bottom
U$166  [#_3#3V#0]  42.42,60.32 90 bottom
U$167  [#_SDA#0]  39.88,60.32 90 bottom
U$168  [#_SCL#0]  37.34,60.32 90 bottom
U$169  [QWIIC_PC_FAN_CONTROLLER0]  23.37,59.94 0 top
U$170  [SPARKX-SMALL]  22.86,71.37 90 bottom
U$171  [QWIIC_PC_FAN_CONTROLLER0]  19.81,71.25 90 bottom
U$172  [OSHW-LOGO-S]  16.51,71.5 90 bottom
U$173  [#_FAN_VCC#0]  30.99,82.3 270 top
U$174  [#PID_TUNING0]  17.78,82.8 0 top
U$175  [KI0]  14.48,77.85 0 top
U$176  [KP0]  20.83,77.85 0 top
U$177  [PWR0]  9.4,78.36 0 top
U$178  [TURN_INDICATOR#SVG0]  22.99,83.69 0 top
U$179  [#FAN_VCC_#0]  30.99,82.3 90 bottom
U$180  [_#_20VDC0]  29.72,81.53 90 bottom
U$181  [STAND-OFF]  55.63,81.53 0 top
U$182  [STAND-OFF]  55.63,61.21 0 top
U$183  [STAND-OFF]  96.27,61.21 0 top
U$184  [STAND-OFF]  96.27,81.53 0 top
U$185  [#_GND#0]  91.19,82.42 270 top
U$186  [#_VCC#0]  88.65,82.42 270 top
U$187  [#_TACH#0]  86.11,82.42 270 top
U$188  [#_PWM#0]  83.57,82.42 270 top
U$189  [#_GND#0]  79.76,82.42 270 top
U$190  [#GND_#0]  91.19,60.32 270 top
U$191  [#3#3V_#0]  88.65,60.32 270 top
U$192  [#SDA_#0]  86.11,60.32 270 top
U$193  [#SCL_#0]  83.57,60.32 270 top
U$194  [QWIIC_3MM]  96.27,76.45 0 top
U$195  [SPARKX-SMALL]  69.6,61.98 0 top
U$196  [#GND_#0]  91.19,82.42 90 bottom
U$197  [#_GND#0]  91.19,60.32 90 bottom
U$198  [#VCC_#0]  88.65,82.42 90 bottom
U$199  [#TACH_#0]  86.11,82.42 90 bottom
U$200  [#PWM_#0]  83.57,82.42 90 bottom
U$201  [#GND_#0]  79.76,82.42 90 bottom
U$202  [#_3#3V#0]  88.65,60.32 90 bottom
U$203  [#_SDA#0]  86.11,60.32 90 bottom
U$204  [#_SCL#0]  83.57,60.32 90 bottom
U$205  [QWIIC_PC_FAN_CONTROLLER0]  69.6,59.94 0 top
U$206  [SPARKX-SMALL]  69.09,71.37 90 bottom
U$207  [QWIIC_PC_FAN_CONTROLLER0]  66.04,71.25 90 bottom
U$208  [OSHW-LOGO-S]  62.74,71.5 90 bottom
U$209  [#_FAN_VCC#0]  77.22,82.3 270 top
U$210  [#PID_TUNING0]  64.01,82.8 0 top
U$211  [KI0]  60.71,77.85 0 top
U$212  [KP0]  67.06,77.85 0 top
U$213  [PWR0]  55.63,78.36 0 top
U$214  [TURN_INDICATOR#SVG0]  69.22,83.69 0 top
U$215  [#FAN_VCC_#0]  77.22,82.3 90 bottom
U$216  [_#_20VDC0]  75.95,81.53 90 bottom
U$217  [STAND-OFF]  9.4,107.44 0 top
U$218  [STAND-OFF]  9.4,87.12 0 top
U$219  [STAND-OFF]  50.04,87.12 0 top
U$220  [STAND-OFF]  50.04,107.44 0 top
U$221  [#_GND#0]  44.96,108.33 270 top
U$222  [#_VCC#0]  42.42,108.33 270 top
U$223  [#_TACH#0]  39.88,108.33 270 top
U$224  [#_PWM#0]  37.34,108.33 270 top
U$225  [#_GND#0]  33.53,108.33 270 top
U$226  [#GND_#0]  44.96,86.23 270 top
U$227  [#3#3V_#0]  42.42,86.23 270 top
U$228  [#SDA_#0]  39.88,86.23 270 top
U$229  [#SCL_#0]  37.34,86.23 270 top
U$230  [QWIIC_3MM]  50.04,102.36 0 top
U$231  [SPARKX-SMALL]  23.37,87.88 0 top
U$232  [#GND_#0]  44.96,108.33 90 bottom
U$233  [#_GND#0]  44.96,86.23 90 bottom
U$234  [#VCC_#0]  42.42,108.33 90 bottom
U$235  [#TACH_#0]  39.88,108.33 90 bottom
U$236  [#PWM_#0]  37.34,108.33 90 bottom
U$237  [#GND_#0]  33.53,108.33 90 bottom
U$238  [#_3#3V#0]  42.42,86.23 90 bottom
U$239  [#_SDA#0]  39.88,86.23 90 bottom
U$240  [#_SCL#0]  37.34,86.23 90 bottom
U$241  [QWIIC_PC_FAN_CONTROLLER0]  23.37,85.85 0 top
U$242  [SPARKX-SMALL]  22.86,97.28 90 bottom
U$243  [QWIIC_PC_FAN_CONTROLLER0]  19.81,97.16 90 bottom
U$244  [OSHW-LOGO-S]  16.51,97.41 90 bottom
U$245  [#_FAN_VCC#0]  30.99,108.2 270 top
U$246  [#PID_TUNING0]  17.78,108.71 0 top
U$247  [KI0]  14.48,103.76 0 top
U$248  [KP0]  20.83,103.76 0 top
U$249  [PWR0]  9.4,104.27 0 top
U$250  [TURN_INDICATOR#SVG0]  22.99,109.6 0 top
U$251  [#FAN_VCC_#0]  30.99,108.2 90 bottom
U$252  [_#_20VDC0]  29.72,107.44 90 bottom
U$253  [STAND-OFF]  55.63,107.44 0 top
U$254  [STAND-OFF]  55.63,87.12 0 top
U$255  [STAND-OFF]  96.27,87.12 0 top
U$256  [STAND-OFF]  96.27,107.44 0 top
U$257  [#_GND#0]  91.19,108.33 270 top
U$258  [#_VCC#0]  88.65,108.33 270 top
U$259  [#_TACH#0]  86.11,108.33 270 top
U$260  [#_PWM#0]  83.57,108.33 270 top
U$261  [#_GND#0]  79.76,108.33 270 top
U$262  [#GND_#0]  91.19,86.23 270 top
U$263  [#3#3V_#0]  88.65,86.23 270 top
U$264  [#SDA_#0]  86.11,86.23 270 top
U$265  [#SCL_#0]  83.57,86.23 270 top
U$266  [QWIIC_3MM]  96.27,102.36 0 top
U$267  [SPARKX-SMALL]  69.6,87.88 0 top
U$268  [#GND_#0]  91.19,108.33 90 bottom
U$269  [#_GND#0]  91.19,86.23 90 bottom
U$270  [#VCC_#0]  88.65,108.33 90 bottom
U$271  [#TACH_#0]  86.11,108.33 90 bottom
U$272  [#PWM_#0]  83.57,108.33 90 bottom
U$273  [#GND_#0]  79.76,108.33 90 bottom
U$274  [#_3#3V#0]  88.65,86.23 90 bottom
U$275  [#_SDA#0]  86.11,86.23 90 bottom
U$276  [#_SCL#0]  83.57,86.23 90 bottom
U$277  [QWIIC_PC_FAN_CONTROLLER0]  69.6,85.85 0 top
U$278  [SPARKX-SMALL]  69.09,97.28 90 bottom
U$279  [QWIIC_PC_FAN_CONTROLLER0]  66.04,97.16 90 bottom
U$280  [OSHW-LOGO-S]  62.74,97.41 90 bottom
U$281  [#_FAN_VCC#0]  77.22,108.2 270 top
U$282  [#PID_TUNING0]  64.01,108.71 0 top
U$283  [KI0]  60.71,103.76 0 top
U$284  [KP0]  67.06,103.76 0 top
U$285  [PWR0]  55.63,104.27 0 top
U$286  [TURN_INDICATOR#SVG0]  69.22,109.6 0 top
U$287  [#FAN_VCC_#0]  77.22,108.2 90 bottom
U$288  [_#_20VDC0]  75.95,107.44 90 bottom
VR1  10k  [TRIMPOT-SMD-3MM-CLOSED]  20.83,28.45 270 top
VR2  10k  [TRIMPOT-SMD-3MM-CLOSED]  14.48,28.45 270 top
VR3  10k  [TRIMPOT-SMD-3MM-CLOSED]  67.06,28.45 270 top
VR4  10k  [TRIMPOT-SMD-3MM-CLOSED]  60.71,28.45 270 top
VR5  10k  [TRIMPOT-SMD-3MM-CLOSED]  20.83,54.36 270 top
VR6  10k  [TRIMPOT-SMD-3MM-CLOSED]  14.48,54.36 270 top
VR7  10k  [TRIMPOT-SMD-3MM-CLOSED]  67.06,54.36 270 top
VR8  10k  [TRIMPOT-SMD-3MM-CLOSED]  60.71,54.36 270 top
VR9  10k  [TRIMPOT-SMD-3MM-CLOSED]  20.83,80.26 270 top
VR10  10k  [TRIMPOT-SMD-3MM-CLOSED]  14.48,80.26 270 top
VR11  10k  [TRIMPOT-SMD-3MM-CLOSED]  67.06,80.26 270 top
VR12  10k  [TRIMPOT-SMD-3MM-CLOSED]  60.71,80.26 270 top
VR13  10k  [TRIMPOT-SMD-3MM-CLOSED]  20.83,106.17 270 top
VR14  10k  [TRIMPOT-SMD-3MM-CLOSED]  14.48,106.17 270 top
VR15  10k  [TRIMPOT-SMD-3MM-CLOSED]  67.06,106.17 270 top
VR16  10k  [TRIMPOT-SMD-3MM-CLOSED]  60.71,106.17 270 top
Y1  16MHz  [CRYSTAL-SMD-2.0X1.6MM]  67.69,13.21 180 top
Y2  16MHz  [CRYSTAL-SMD-2.0X1.6MM]  21.46,13.21 180 top
Y3  16MHz  [CRYSTAL-SMD-2.0X1.6MM]  21.46,39.12 180 top
Y4  16MHz  [CRYSTAL-SMD-2.0X1.6MM]  67.69,39.12 180 top
Y5  16MHz  [CRYSTAL-SMD-2.0X1.6MM]  21.46,65.02 180 top
Y6  16MHz  [CRYSTAL-SMD-2.0X1.6MM]  67.69,65.02 180 top
Y7  16MHz  [CRYSTAL-SMD-2.0X1.6MM]  21.46,90.93 180 top
Y8  16MHz  [CRYSTAL-SMD-2.0X1.6MM]  67.69,90.93 180 top

## Library data of the parts
C1 C4 C5 C9 C11 C14 C16 C19 C21 C24 C26 C29 C31 C34 C36 C39 = SparkFun-Capacitors; PROD_ID: CAP-07876
C2 C7 C12 C17 C22 C27 C32 C37 = SparkFun-Capacitors; PROD_ID: CAP-11015
C3 C8 C13 C18 C23 C28 C33 C38 = SparkFun-Capacitors; PROD_ID: CAP-00810
C6 C10 C15 C20 C25 C30 C35 C40 = SparkFun-Capacitors; PROD_ID: CAP-08402
D1 D2 D4 D5 D7 D8 D10 D11 D13 D14 D16 D17 D19 D20 D22 D23 = SparkFun-DiscreteSemi; PROD_ID: DIO-08199
D3 D6 D9 D12 D15 D18 D21 D24 = SparkFun-LED; PROD_ID: DIO-00819
E$1-E$4 U$17 U$37 U$50 U$64 U$86 U$100 U$122 U$136 U$158 U$172 U$194 U$208 U$230 U$244 U$266 U$280 = SparkFun-Aesthetics
E$5 E$6 = SparkFun-Retired
F1-F8 = SparkFun-Fuses; PROD_ID: RES-11150
J1 J2 J7 J8 J13 J14 J19 J20 J25 J26 J31 J32 J37 J38 J43 J44 = SparkFun-Connectors; PROD_ID: CONN-13694
J3-J5 J9 J10 J12 J15 J16 J18 J21 J22 J24 J27 J28 J30 J33 J34 J36 J39 J40 J42 J45 J46 J48 = SparkFun-Connectors
J6 J11 J17 J23 J29 J35 J41 J47 = SparkFun-Connectors; PROD_ID: CONN-09696
L1-L8 = SparkFun-Coils; PROD_ID: NDUC-14257
Q1 Q6 Q7 Q9 Q13 Q14 Q18 Q19 Q23 Q24 Q28 Q29 Q33 Q34 Q38 Q39 = SparkFun-DiscreteSemi; PROD_ID: TRAN-14388
Q2-Q5 Q11 Q12 Q16 Q17 Q21 Q22 Q26 Q27 Q31 Q32 Q36 Q37 = SparkFun-DiscreteSemi; PROD_ID: TRANS-11151
Q8 Q10 Q15 Q20 Q25 Q30 Q35 Q40 = SparkFun-DiscreteSemi; PROD_ID: TRAN-14386
R1 R14 R27 R40 R53 R66 R79 R92 = SparkFun-Resistors; PROD_ID: RES-13768
R2 R7 R8 R12 R17 R22 R23 R26 R30 R35 R36 R39 R43 R48 R49 R52 R56 R61 R62 R65 R69 R74 R75 R78 R82 R87 R88 R91 R95 R100 R101 R104 = SparkFun-Resistors; PROD_ID: RES-00824
R3 R9 R21 R24 R34 R37 R47 R50 R60 R63 R73 R76 R86 R89 R99 R102 = SparkFun-Resistors; PROD_ID: RES-07856
R4 R18 R31 R44 R57 R70 R83 R96 = SparkFun-Resistors; PROD_ID: RES-07828
R5 R6 R11 R13 R15 R16 R19 R20 R28 R29 R32 R33 R41 R42 R45 R46 R54 R55 R58 R59 R67 R68 R71 R72 R80 R81 R84 R85 R93 R94 R97 R98 = SparkFun-Resistors; PROD_ID: RES-08272
R10 R25 R38 R51 R64 R77 R90 R103 = SparkFun-Resistors; PROD_ID: RES-07871
U1 U2 U5 U7 U9 U11 U13 U15 = SparkFun-IC-Microcontroller; PROD_ID: IC-14692
U3 U4 U6 U8 U10 U12 U14 U16 = SparkFun-IC-Power; PROD_ID: IC-13769
U$1 U$2 U$7-U$16 U$19-U$32 U$35 U$41-U$49 U$52-U$61 U$63 U$65-U$69 U$71 U$72 U$77-U$85 U$88-U$97 U$99 U$101-U$105 U$107 U$108 U$113-U$121 U$124-U$133 U$135 U$137-U$141 U$143 U$144 U$149-U$157 U$160-U$169 U$171 U$173-U$177 U$179 U$180 U$185-U$193 U$196-U$205 U$207 U$209-U$213 U$215 U$216 U$221-U$229 U$232-U$241 U$243 U$245-U$249 U$251 U$252 U$257-U$265 U$268-U$277 U$279 U$281-U$285 U$287 U$288 = output
U$3-U$6 U$33 U$34 U$39 U$40 U$73-U$76 U$109-U$112 U$145-U$148 U$181-U$184 U$217-U$220 U$253-U$256 = SparkFun-Hardware
U$18 U$36 U$51 U$62 U$87 U$98 U$123 U$134 U$159 U$170 U$195 U$206 U$231 U$242 U$267 U$278 = SparkX
U$38 U$70 U$106 U$142 U$178 U$214 U$250 U$286 = turn_indicators
VR1-VR16 = SparkFun-Resistors; PROD_ID: RES-09285
Y1-Y8 = SparkFun-Clocks; PROD_ID: XTAL-14681

## Nets
3.3V: C2.1 J1.2 J2.2 J4.2 L1.1 Q2.1 Q3.1 R5.2 R11.2 U3.2 U3.3
3.3V1: C7.1 J7.2 J8.2 J10.2 L2.1 Q4.1 Q5.1 R15.2 R19.2 U4.2 U4.3
3.3V2: C12.1 J13.2 J14.2 J16.2 L3.1 Q11.1 Q12.1 R28.2 R32.2 U6.2 U6.3
3.3V3: C17.1 J19.2 J20.2 J22.2 L4.1 Q16.1 Q17.1 R41.2 R45.2 U8.2 U8.3
3.3V4: C22.1 J25.2 J26.2 J28.2 L5.1 Q21.1 Q22.1 R54.2 R58.2 U10.2 U10.3
3.3V5: C27.1 J31.2 J32.2 J34.2 L6.1 Q26.1 Q27.1 R67.2 R71.2 U12.2 U12.3
3.3V6: C32.1 J37.2 J38.2 J40.2 L7.1 Q31.1 Q32.1 R80.2 R84.2 U14.2 U14.3
3.3V7: C37.1 J43.2 J44.2 J46.2 L8.1 Q36.1 Q37.1 R93.2 R97.2 U16.2 U16.3
5V: C3.1 D3.A F1.2 J3.2 Q7.3 Q8.1 R2.2 R6.2 R13.2 U1.1 VR1.1 VR2.1
5V1: C8.1 D6.A F2.2 J9.2 Q9.3 Q10.1 R16.2 R17.2 R20.2 U2.1 VR3.1 VR4.1
5V2: C13.1 D9.A F3.2 J15.2 Q14.3 Q15.1 R29.2 R30.2 R33.2 U5.1 VR5.1 VR6.1
5V3: C18.1 D12.A F4.2 J21.2 Q19.3 Q20.1 R42.2 R43.2 R46.2 U7.1 VR7.1 VR8.1
5V4: C23.1 D15.A F5.2 J27.2 Q24.3 Q25.1 R55.2 R56.2 R59.2 U9.1 VR9.1 VR10.1
5V5: C28.1 D18.A F6.2 J33.2 Q29.3 Q30.1 R68.2 R69.2 R72.2 U11.1 VR11.1 VR12.1
5V6: C33.1 D21.A F7.2 J39.2 Q34.3 Q35.1 R81.2 R82.2 R85.2 U13.1 VR13.1 VR14.1
5V7: C38.1 D24.A F8.2 J45.2 Q39.3 Q40.1 R94.2 R95.2 R98.2 U15.1 VR15.1 VR16.1
!FAN_EN: R3.1 U1.11
!FAN_EN1: R21.1 U2.11
!FAN_EN2: R34.1 U5.11
!FAN_EN3: R47.1 U7.11
!FAN_EN4: R60.1 U9.11
!FAN_EN5: R73.1 U11.11
!FAN_EN6: R86.1 U13.11
!FAN_EN7: R99.1 U15.11
!RST: J3.5 R2.1 U1.4
!RST1: J9.5 R17.1 U2.4
!RST2: J15.5 R30.1 U5.4
!RST3: J21.5 R43.1 U7.4
!RST4: J27.5 R56.1 U9.4
!RST5: J33.5 R69.1 U11.4
!RST6: J39.5 R82.1 U13.4
!RST7: J45.5 R95.1 U15.4
CIPO: J3.1 U1.8
CIPO1: J9.1 U2.8
CIPO2: J15.1 U5.8
CIPO3: J21.1 U7.8
CIPO4: J27.1 U9.8
CIPO5: J33.1 U11.8
CIPO6: J39.1 U13.8
CIPO7: J45.1 U15.8
FAN_PWM: D1.C J6.4 U1.10
FAN_PWM1: D5.C J11.4 U2.10
FAN_PWM2: D8.C J17.4 U5.10
FAN_PWM3: D11.C J23.4 U7.10
FAN_PWM4: D14.C J29.4 U9.10
FAN_PWM5: D17.C J35.4 U11.10
FAN_PWM6: D20.C J41.4 U13.10
FAN_PWM7: D23.C J47.4 U15.10
FAN_PWR: J6.2 Q1.3
FAN_PWR1: J11.2 Q6.3
FAN_PWR2: J17.2 Q13.3
FAN_PWR3: J23.2 Q18.3
FAN_PWR4: J29.2 Q23.3
FAN_PWR5: J35.2 Q28.3
FAN_PWR6: J41.2 Q33.3
FAN_PWR7: J47.2 Q38.3
FAN_TACH: D2.C J6.3 R8.1 U1.6
FAN_TACH1: D4.C J11.3 R23.1 U2.6
FAN_TACH2: D7.C J17.3 R36.1 U5.6
FAN_TACH3: D10.C J23.3 R49.1 U7.6
FAN_TACH4: D13.C J29.3 R62.1 U9.6
FAN_TACH5: D16.C J35.3 R75.1 U11.6
FAN_TACH6: D19.C J41.3 R88.1 U13.6
FAN_TACH7: D22.C J47.3 R101.1 U15.6
GND [power]: C1.1 C2.2 C3.2 C4.1 C6.2 D1.A D2.A J1.1 J2.1 J3.6 J4.1 J5.1 J6.1 R4.1 R9.1 R10.1 R12.1 U1.14 U3.4 U3.8 VR1.3 VR2.3
GND1 [power]: C5.1 C7.2 C8.2 C9.1 C10.2 D4.A D5.A J7.1 J8.1 J9.6 J10.1 J11.1 J12.1 R18.1 R24.1 R25.1 R26.1 U2.14 U4.4 U4.8 VR3.3 VR4.3
GND2 [power]: C11.1 C12.2 C13.2 C14.1 C15.2 D7.A D8.A J13.1 J14.1 J15.6 J16.1 J17.1 J18.1 R31.1 R37.1 R38.1 R39.1 U5.14 U6.4 U6.8 VR5.3 VR6.3
GND3 [power]: C16.1 C17.2 C18.2 C19.1 C20.2 D10.A D11.A J19.1 J20.1 J21.6 J22.1 J23.1 J24.1 R44.1 R50.1 R51.1 R52.1 U7.14 U8.4 U8.8 VR7.3 VR8.3
GND4 [power]: C21.1 C22.2 C23.2 C24.1 C25.2 D13.A D14.A J25.1 J26.1 J27.6 J28.1 J29.1 J30.1 R57.1 R63.1 R64.1 R65.1 U9.14 U10.4 U10.8 VR9.3 VR10.3
GND5 [power]: C26.1 C27.2 C28.2 C29.1 C30.2 D16.A D17.A J31.1 J32.1 J33.6 J34.1 J35.1 J36.1 R70.1 R76.1 R77.1 R78.1 U11.14 U12.4 U12.8 VR11.3 VR12.3
GND6 [power]: C31.1 C32.2 C33.2 C34.1 C35.2 D19.A D20.A J37.1 J38.1 J39.6 J40.1 J41.1 J42.1 R83.1 R89.1 R90.1 R91.1 U13.14 U14.4 U14.8 VR13.3 VR14.3
GND7 [power]: C36.1 C37.2 C38.2 C39.1 C40.2 D22.A D23.A J43.1 J44.1 J45.6 J46.1 J47.1 J48.1 R96.1 R102.1 R103.1 R104.1 U15.14 U16.4 U16.8 VR15.3 VR16.3
HV_SCL: J3.3 Q2.3 R13.1 U1.9
HV_SCL1: J9.3 Q4.3 R16.1 U2.9
HV_SCL2: J15.3 Q11.3 R29.1 U5.9
HV_SCL3: J21.3 Q16.3 R42.1 U7.9
HV_SCL4: J27.3 Q21.3 R55.1 U9.9
HV_SCL5: J33.3 Q26.3 R68.1 U11.9
HV_SCL6: J39.3 Q31.3 R81.1 U13.9
HV_SCL7: J45.3 Q36.3 R94.1 U15.9
HV_SDA: J3.4 Q3.3 R6.1 U1.7
HV_SDA1: J9.4 Q5.3 R20.1 U2.7
HV_SDA2: J15.4 Q12.3 R33.1 U5.7
HV_SDA3: J21.4 Q17.3 R46.1 U7.7
HV_SDA4: J27.4 Q22.3 R59.1 U9.7
HV_SDA5: J33.4 Q27.3 R72.1 U11.7
HV_SDA6: J39.4 Q32.3 R85.1 U13.7
HV_SDA7: J45.4 Q37.3 R98.1 U15.7
KI_TRIM: U1.13 VR2.2
KI_TRIM1: U2.13 VR4.2
KI_TRIM2: U5.13 VR6.2
KI_TRIM3: U7.13 VR8.2
KI_TRIM4: U9.13 VR10.2
KI_TRIM5: U11.13 VR12.2
KI_TRIM6: U13.13 VR14.2
KI_TRIM7: U15.13 VR16.2
KP_TRIM: U1.12 VR1.2
KP_TRIM1: U2.12 VR3.2
KP_TRIM2: U5.12 VR5.2
KP_TRIM3: U7.12 VR7.2
KP_TRIM4: U9.12 VR9.2
KP_TRIM5: U11.12 VR11.2
KP_TRIM6: U13.12 VR13.2
KP_TRIM7: U15.12 VR15.2
N$1: C4.2 U1.3 Y2.1
N$2: R1.1 R4.2 U3.5
N$3: L1.2 U3.1
N$4: C1.2 U1.2 Y2.3
N$5: Q1.1 R3.2 R7.1
N$6: C6.1 F1.1 R1.2 U3.7
N$7: D3.C R9.2
N$8: R14.1 R18.2 U4.5
N$9: L2.2 U4.1
N$10: C9.2 U2.3 Y1.1
N$11: C5.2 U2.2 Y1.3
N$12: Q6.1 R21.2 R22.1
N$13: C10.1 F2.1 R14.2 U4.7
N$14: D6.C R24.2
N$15: Q7.1 Q8.3 R10.2
N$16: Q8.2 Q8.5 Q8.6 R12.2
N$17: Q9.1 Q10.3 R25.2
N$18: Q10.2 Q10.5 Q10.6 R26.2
N$19: R27.1 R31.2 U6.5
N$20: L3.2 U6.1
N$21: C14.2 U5.3 Y3.1
N$22: C11.2 U5.2 Y3.3
N$23: Q13.1 R34.2 R35.1
N$24: C15.1 F3.1 R27.2 U6.7
N$25: D9.C R37.2
N$26: Q14.1 Q15.3 R38.2
N$27: Q15.2 Q15.5 Q15.6 R39.2
N$28: R40.1 R44.2 U8.5
N$29: L4.2 U8.1
N$30: C19.2 U7.3 Y4.1
N$31: C16.2 U7.2 Y4.3
N$32: Q18.1 R47.2 R48.1
N$33: C20.1 F4.1 R40.2 U8.7
N$34: D12.C R50.2
N$35: Q19.1 Q20.3 R51.2
N$36: Q20.2 Q20.5 Q20.6 R52.2
N$37: R53.1 R57.2 U10.5
N$38: L5.2 U10.1
N$39: C24.2 U9.3 Y5.1
N$40: C21.2 U9.2 Y5.3
N$41: Q23.1 R60.2 R61.1
N$42: C25.1 F5.1 R53.2 U10.7
N$43: D15.C R63.2
N$44: Q24.1 Q25.3 R64.2
N$45: Q25.2 Q25.5 Q25.6 R65.2
N$46: R66.1 R70.2 U12.5
N$47: L6.2 U12.1
N$48: C29.2 U11.3 Y6.1
N$49: C26.2 U11.2 Y6.3
N$50: Q28.1 R73.2 R74.1
N$51: C30.1 F6.1 R66.2 U12.7
N$52: D18.C R76.2
N$53: Q29.1 Q30.3 R77.2
N$54: Q30.2 Q30.5 Q30.6 R78.2
N$55: R79.1 R83.2 U14.5
N$56: L7.2 U14.1
N$57: C34.2 U13.3 Y7.1
N$58: C31.2 U13.2 Y7.3
N$59: Q33.1 R86.2 R87.1
N$60: C35.1 F7.1 R79.2 U14.7
N$61: D21.C R89.2
N$62: Q34.1 Q35.3 R90.2
N$63: Q35.2 Q35.5 Q35.6 R91.2
N$64: R92.1 R96.2 U16.5
N$65: L8.2 U16.1
N$66: C39.2 U15.3 Y8.1
N$67: C36.2 U15.2 Y8.3
N$68: Q38.1 R99.2 R100.1
N$69: C40.1 F8.1 R92.2 U16.7
N$70: D24.C R102.2
N$71: Q39.1 Q40.3 R103.2
N$72: Q40.2 Q40.5 Q40.6 R104.2
SCL: J1.4 J2.4 J4.4 Q2.2 R11.1
SCL1: J7.4 J8.4 J10.4 Q4.2 R15.1
SCL2: J13.4 J14.4 J16.4 Q11.2 R28.1
SCL3: J19.4 J20.4 J22.4 Q16.2 R41.1
SCL4: J25.4 J26.4 J28.4 Q21.2 R54.1
SCL5: J31.4 J32.4 J34.4 Q26.2 R67.1
SCL6: J37.4 J38.4 J40.4 Q31.2 R80.1
SCL7: J43.4 J44.4 J46.4 Q36.2 R93.1
SDA: J1.3 J2.3 J4.3 Q3.2 R5.1
SDA1: J7.3 J8.3 J10.3 Q5.2 R19.1
SDA2: J13.3 J14.3 J16.3 Q12.2 R32.1
SDA3: J19.3 J20.3 J22.3 Q17.2 R45.1
SDA4: J25.3 J26.3 J28.3 Q22.2 R58.1
SDA5: J31.3 J32.3 J34.3 Q27.2 R71.1
SDA6: J37.3 J38.3 J40.3 Q32.2 R84.1
SDA7: J43.3 J44.3 J46.3 Q37.2 R97.1
VCC_1: J12.2 Q6.2 Q9.2 Q10.4 R22.2 R23.2
VCC_2: J5.2 Q1.2 Q7.2 Q8.4 R7.2 R8.2
VCC_3: J18.2 Q13.2 Q14.2 Q15.4 R35.2 R36.2
VCC_4: J24.2 Q18.2 Q19.2 Q20.4 R48.2 R49.2
VCC_5: J30.2 Q23.2 Q24.2 Q25.4 R61.2 R62.2
VCC_6: J36.2 Q28.2 Q29.2 Q30.4 R74.2 R75.2
VCC_7: J42.2 Q33.2 Q34.2 Q35.4 R87.2 R88.2
VCC_8: J48.2 Q38.2 Q39.2 Q40.4 R100.2 R101.2